# Altium PCB Kar_PCB.PcbDoc
Units mil, origin at the board's own origin, x right, y up, seen from the top; angles counter-clockwise.
Board outline 5655 x 3804.13 mil, 4 copper layers (Top Layer, Layer 1, Layer 2, Bottom Layer), stack 31.732 mil thick; 55 components, 40 nets, 277 pads, 218 vias.
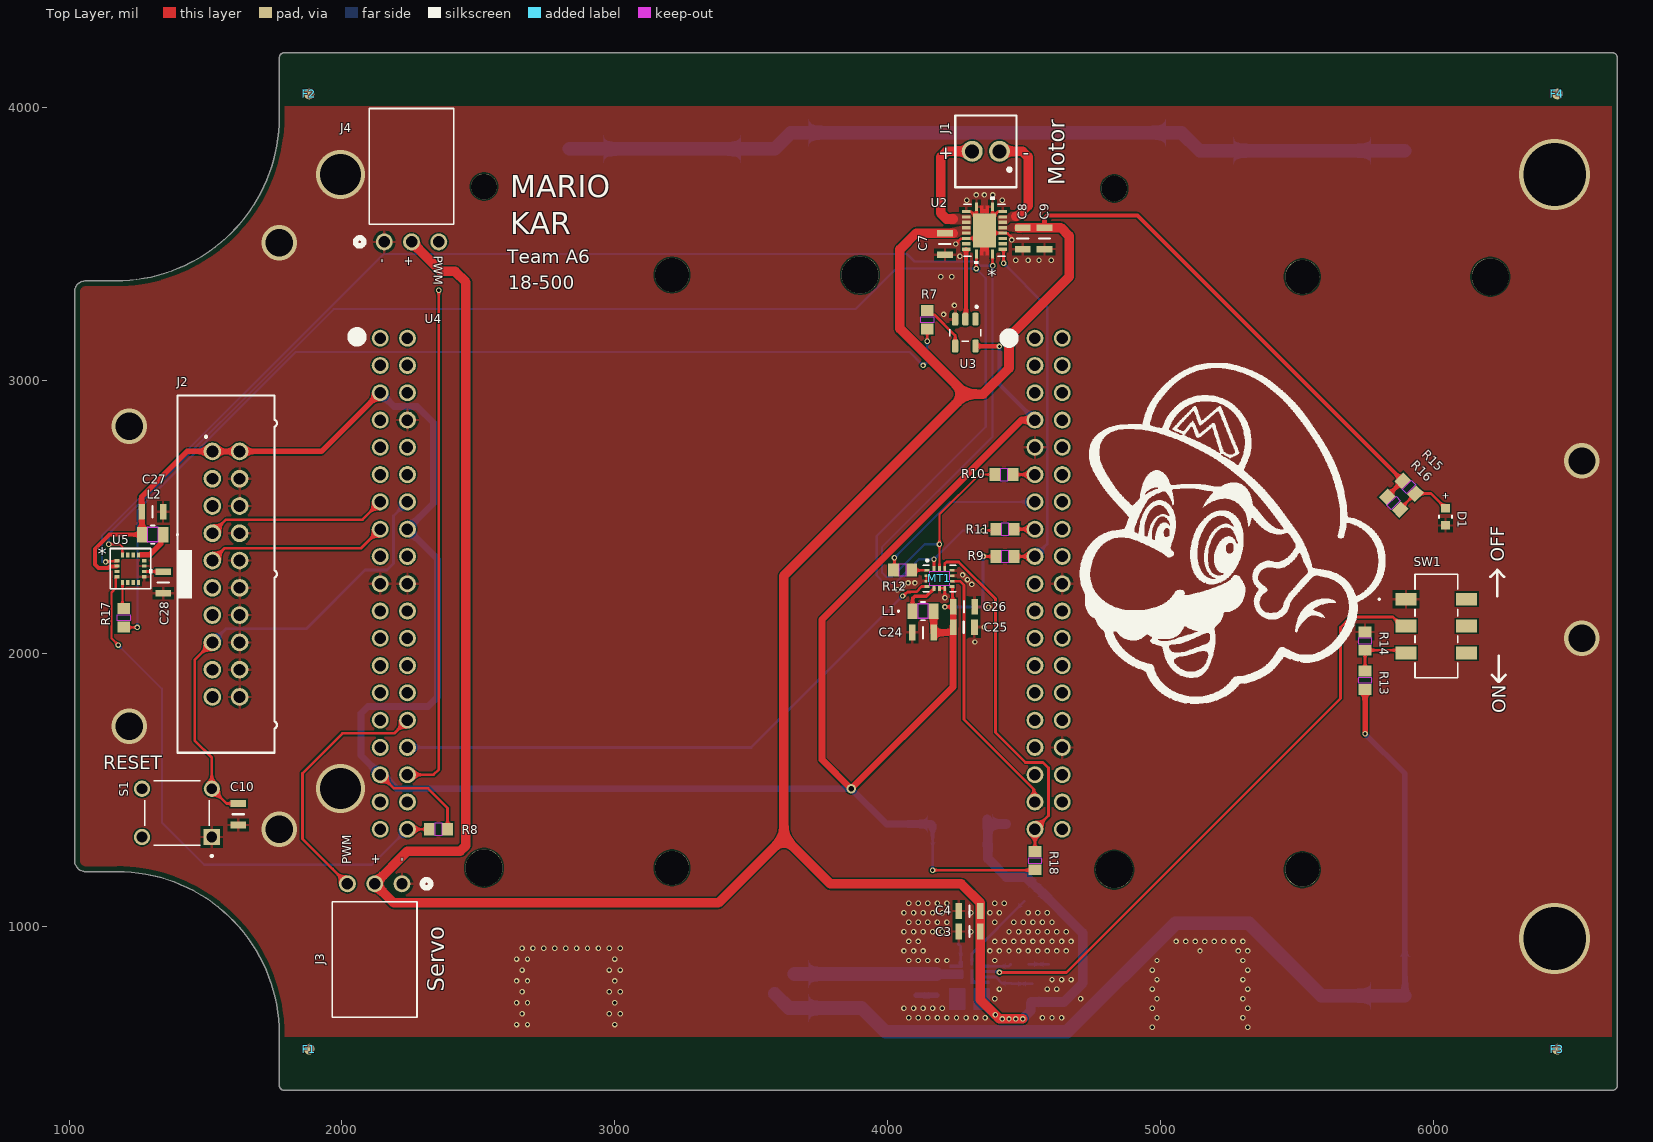
[diagram p0: Top Layer view]
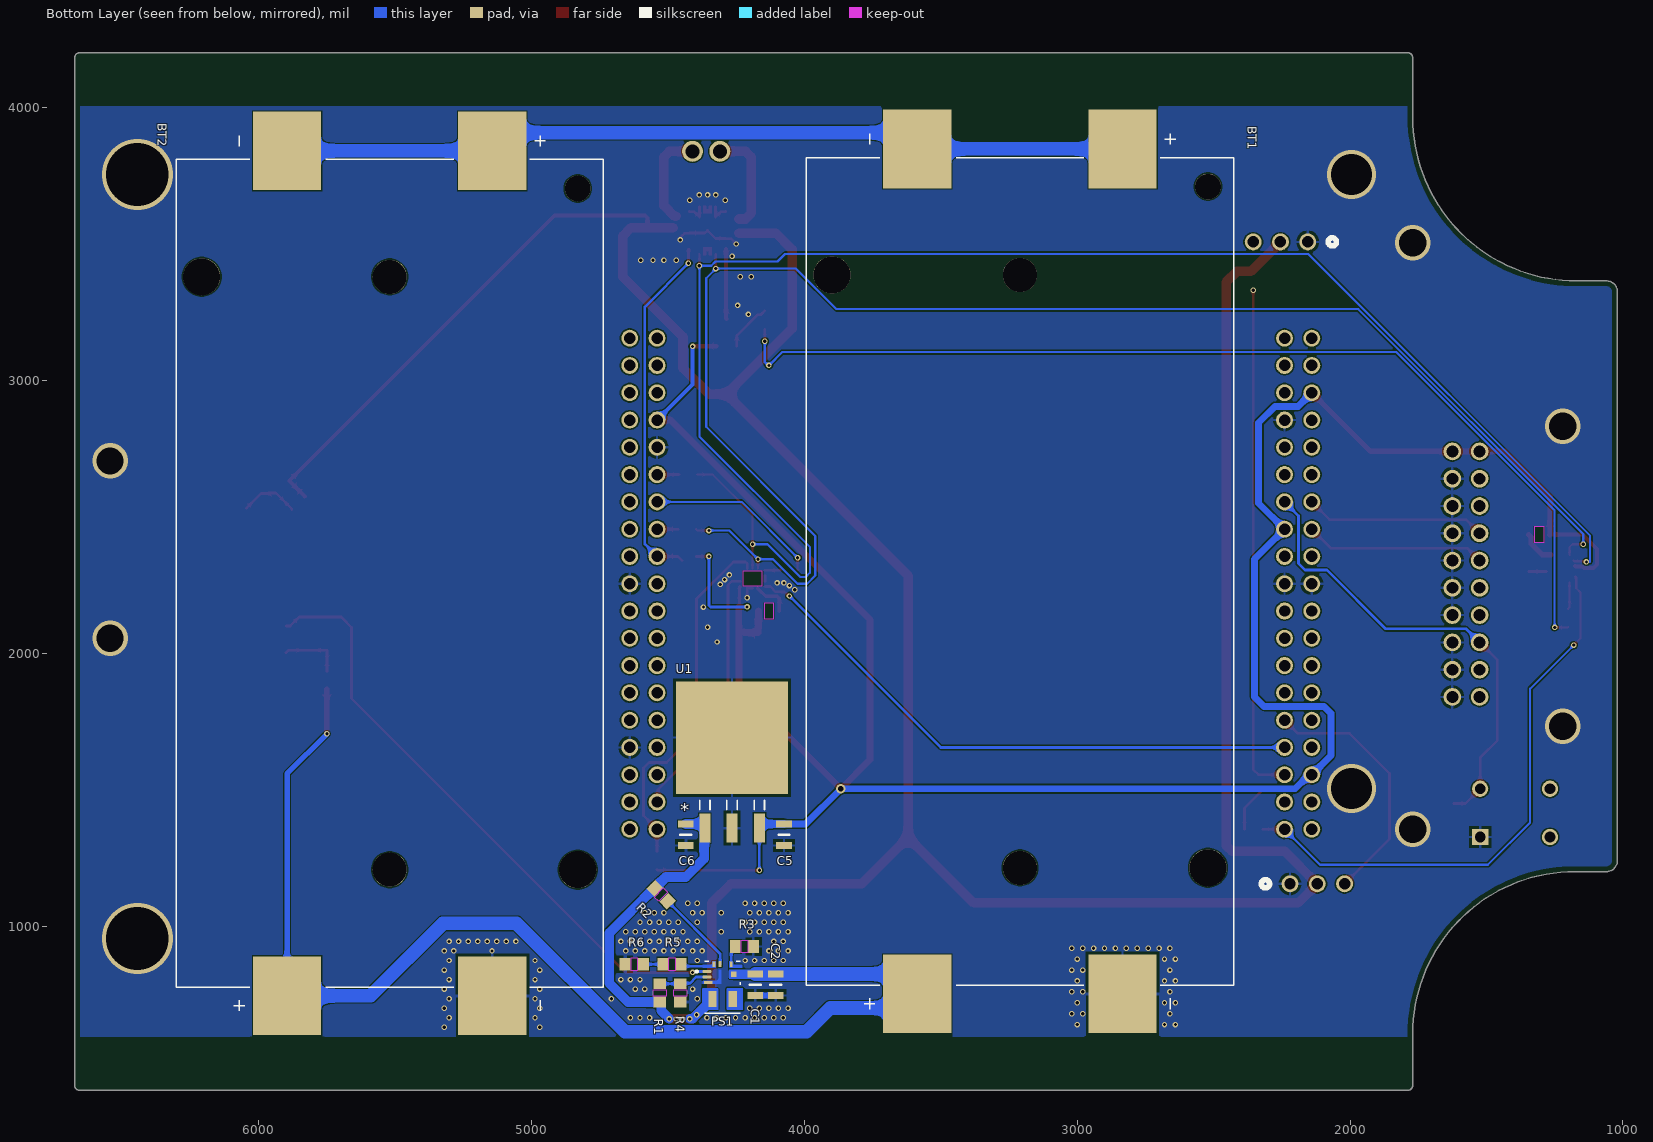
[diagram p1: Bottom Layer view, seen from below]
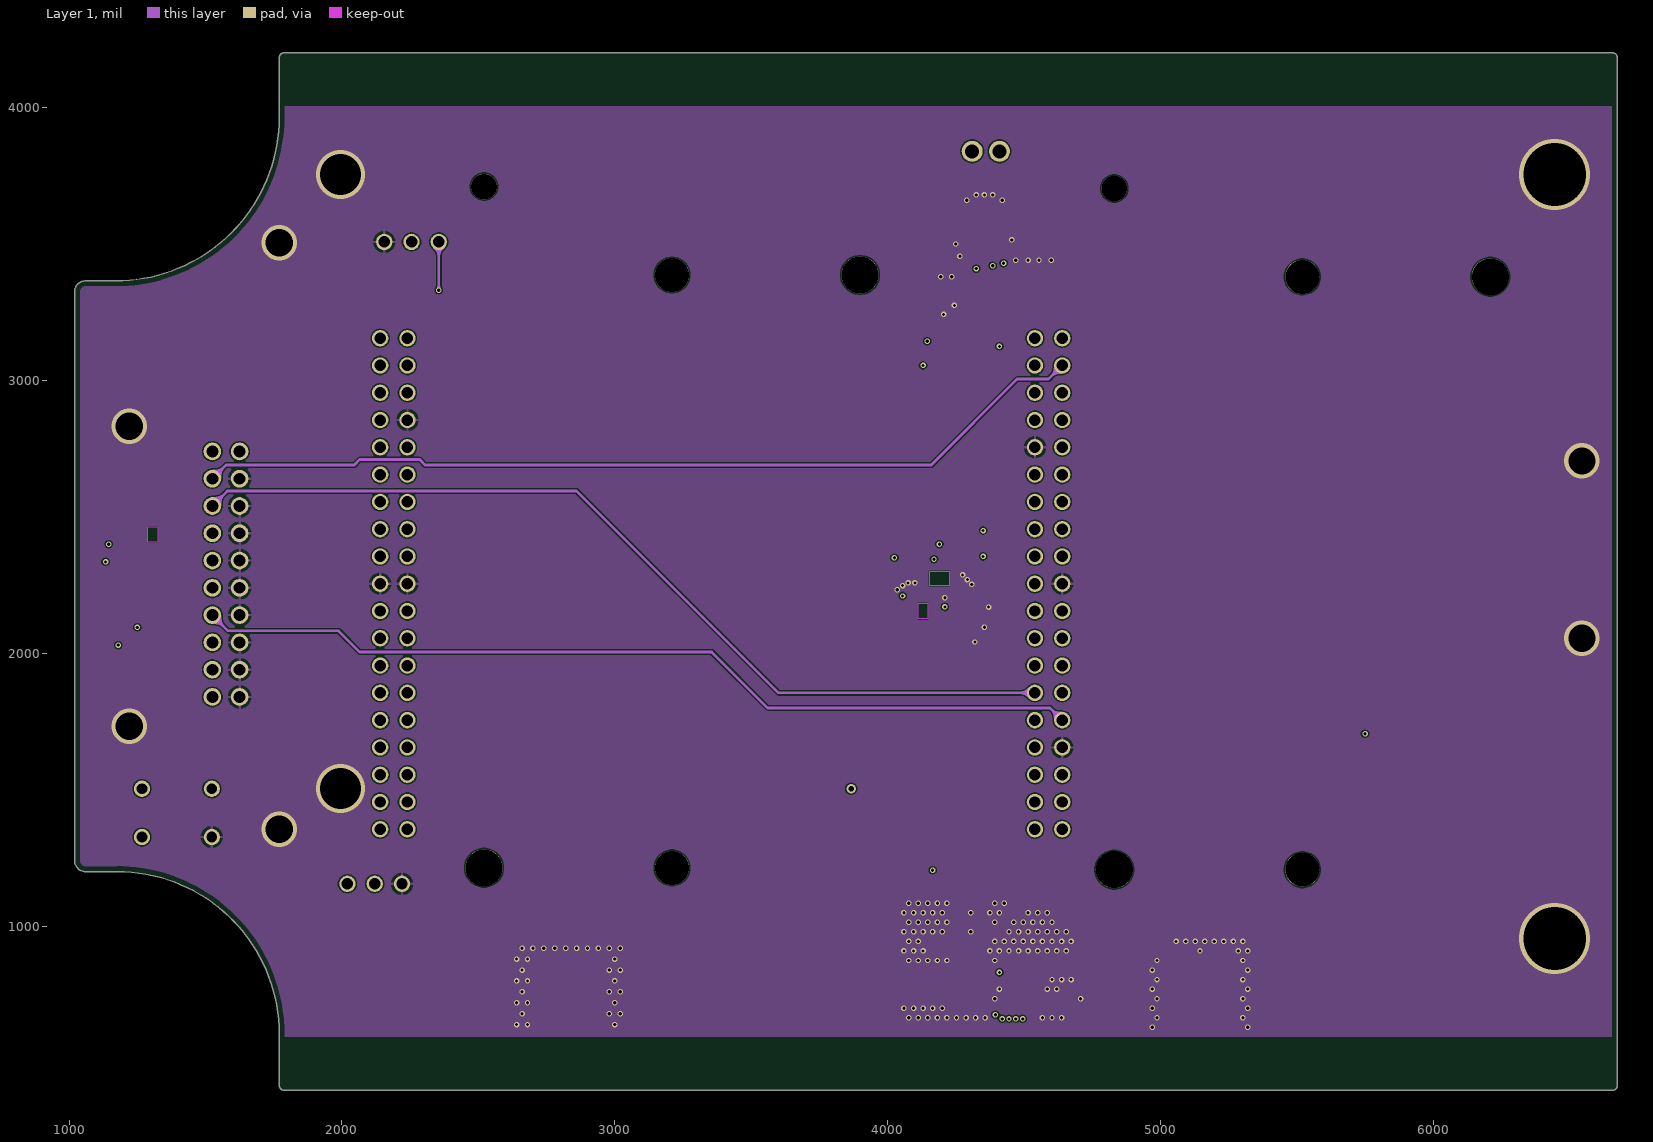
[diagram p2: Layer 1]
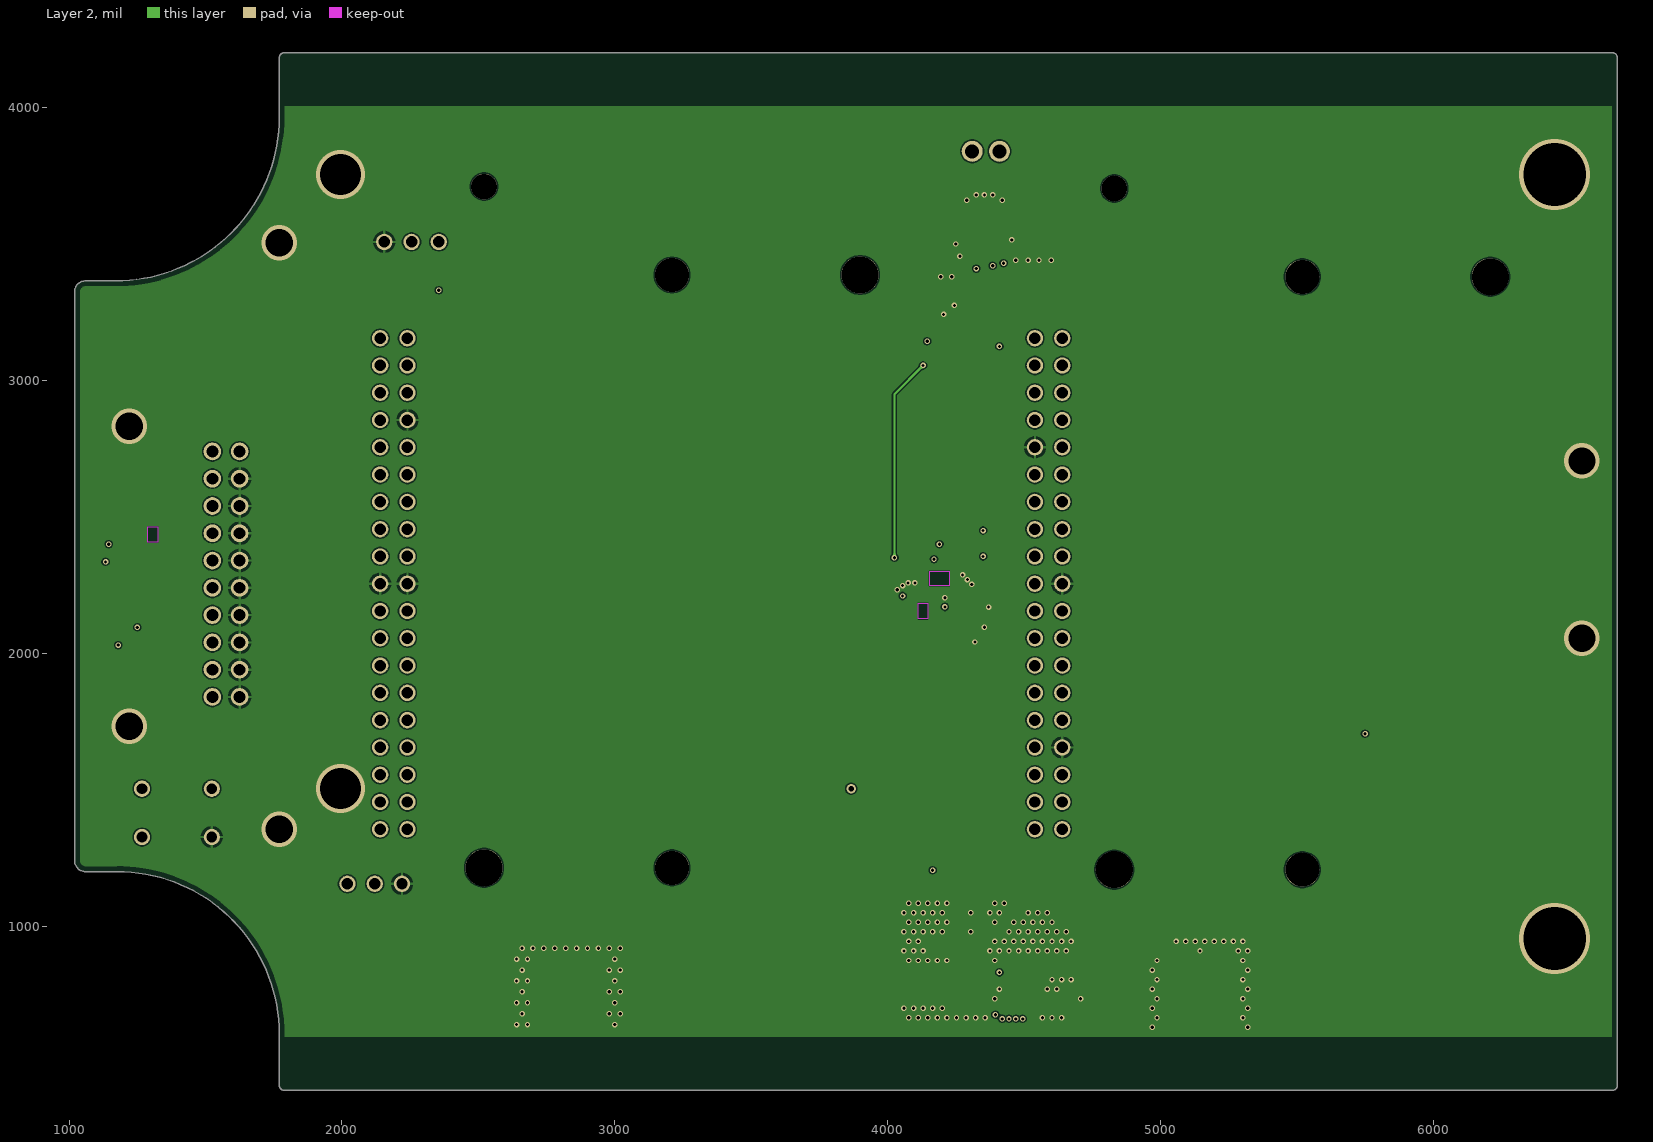
[diagram p3: Layer 2]
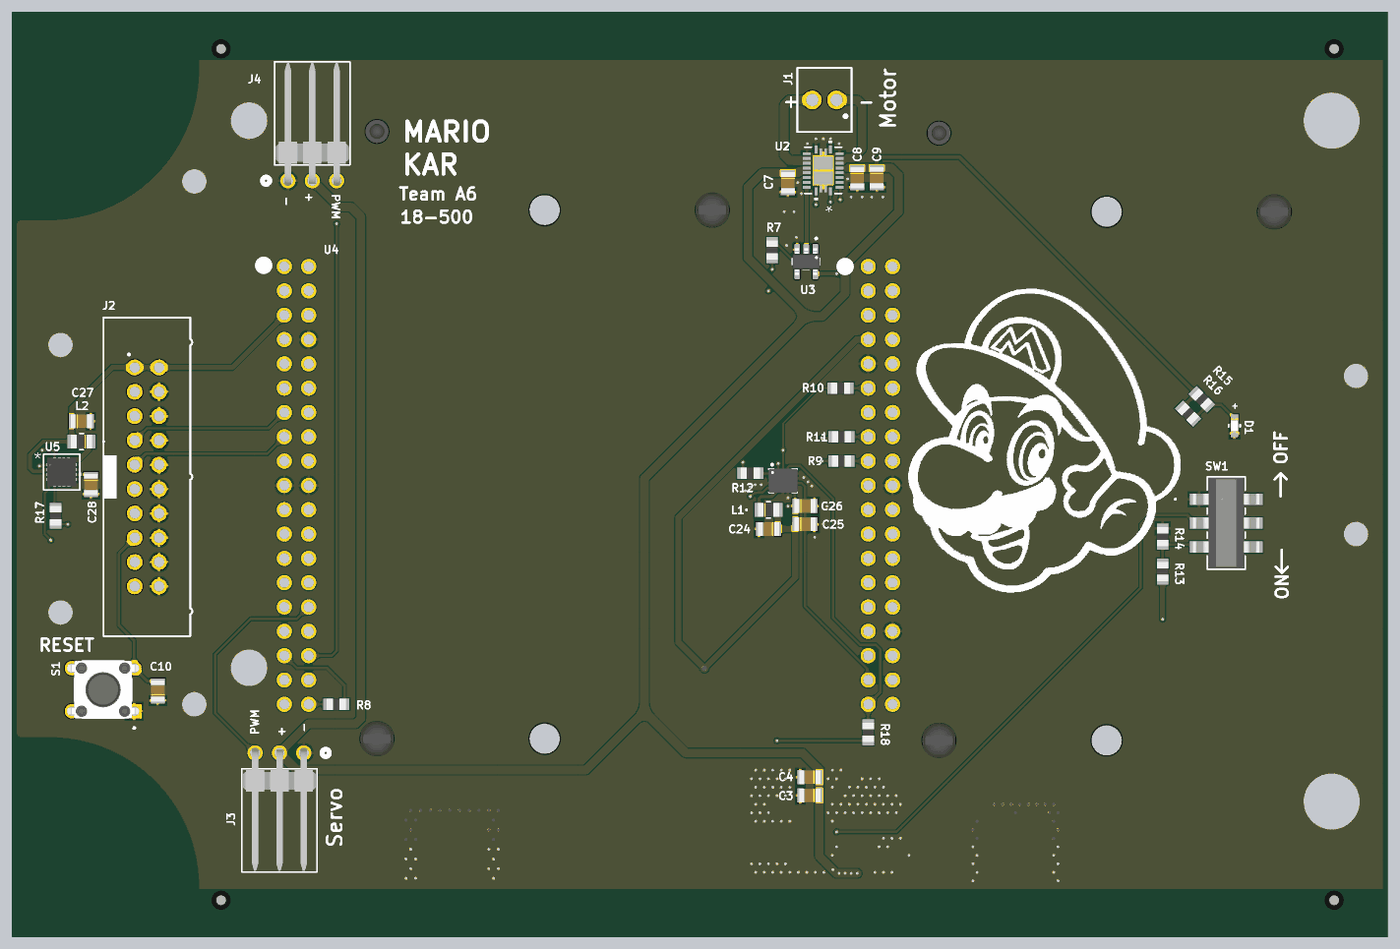
[diagram p4: 3D render of the assembled board from above, using the file's embedded part models]
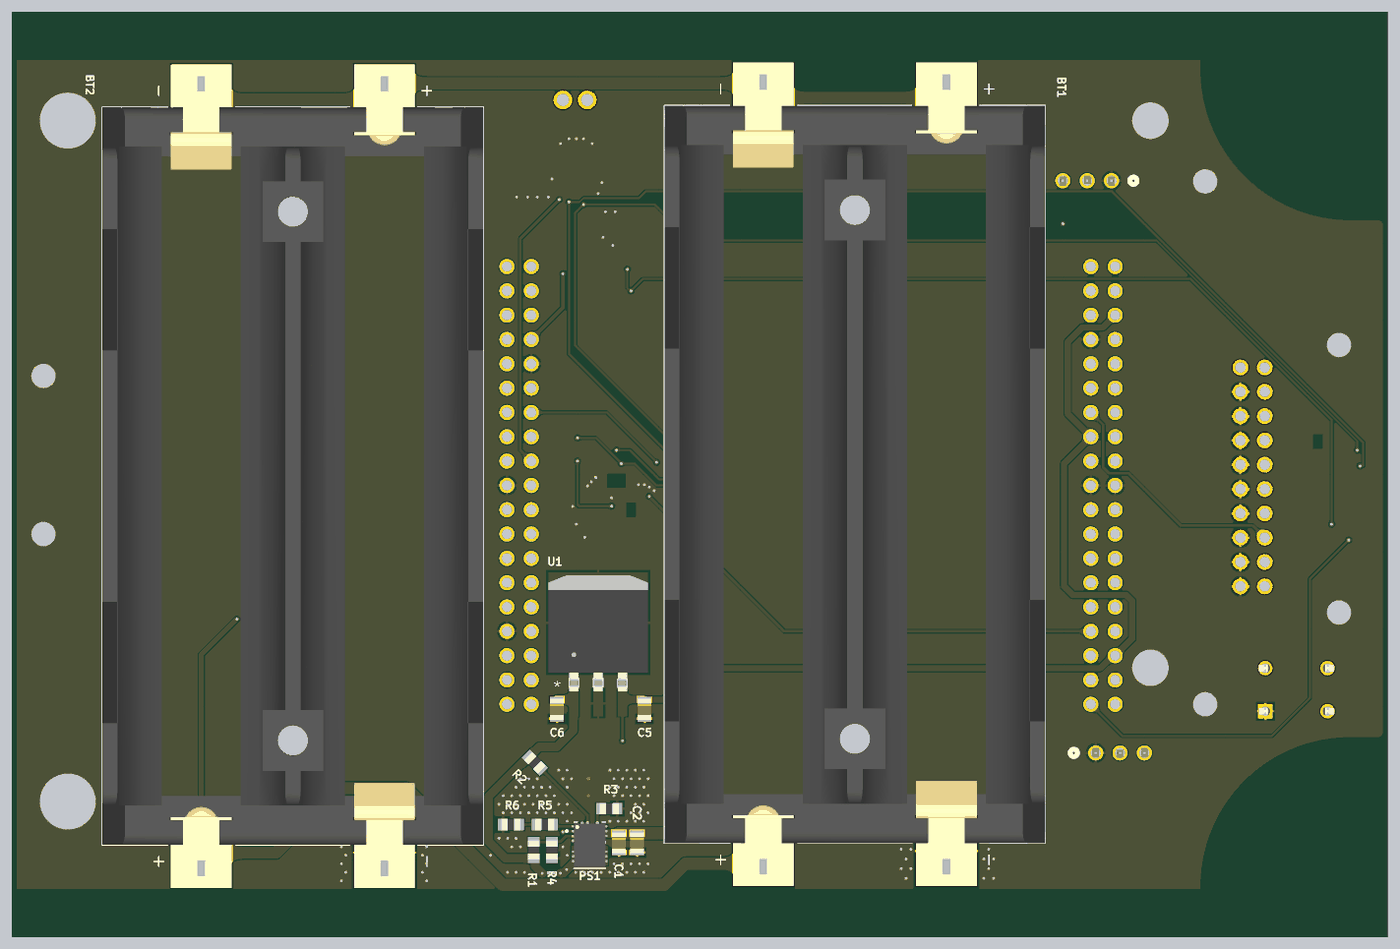
[diagram p5: 3D render of the assembled board from below, using the file's embedded part models]

## Layer stack, top to bottom
Top Solder: solder mask 0.3937, Solder Resist, Dk 3.5
Top Layer: signal copper 2.7559
Dielectric 2: prepreg 7.9921, PP-022, Dk 4.5
Layer 1: signal copper 1.1811
Dielectric 1: dielectric 7.874, FR-4, Dk 4.8
Layer 2: signal copper 1.1811
Dielectric 3: prepreg 7.9921, PP-022, Dk 4.5
Bottom Layer: signal copper 2.7559
Bottom Solder: solder mask 0.3937, Solder Resist, Dk 3.5

## Board outline
1060,1200.94 1175,1200.94 cw(c1175,605.94) 1770,605.94 1770,418.31 ccw(c1789.69,418.31) 1789.69,398.62 6655.31,398.62 ccw(c6655.31,418.31) 6675,418.31 6675,4183.07 ccw(c6655.32,4183.07) 6655.32,4202.76 1789.68,4202.76 ccw(c1789.68,4183.07) 1770,4183.07 1770,3965.94 cw(c1170,3965.94) 1170,3365.94 1060,3365.94 ccw(c1060,3325.94) 1020,3325.94 1020,1240.94 ccw(c1060,1240.94)

## Design rules (kind name [scope] priority, off if disabled: settings)
BoardOutlineClearance [All] p1: gap=19.68 ignorepadtopadclearanceinfootprint=FALSE
Clearance Clearance_KOL [IsKeepOut] p1: gap=2 ignorepadtopadclearanceinfootprint=FALSE
Clearance Clearance_KOL_1 [OnLayer('Keep-Out Layer')] p2: gap=2 ignorepadtopadclearanceinfootprint=FALSE
Clearance [All] p3: gap=5 ignorepadtopadclearanceinfootprint=FALSE
ComponentClearance ComponentClearance_1 [All vs InComponent('U4')] p1: gap=-1 collisioncheckmode=3 verticalgap=-1 showdistances=FALSE
ComponentClearance [All] p2: gap=10 collisioncheckmode=3 verticalgap=10 showdistances=FALSE
HoleSize [All] p1: absolutevalues=TRUE maxlimit=236.22 minlimit=0.98 maxpercent=80.000 minpercent=20.000
MinimumSolderMaskSliver [All] p1: minsoldermaskwidth=5
PolygonConnect PolygonConnect_5V [All vs InNet('5V')] p1: connectstyle=Direct reliefconductorwidth=10 reliefentries=4 polygonreliefangle="90 Angle" airgapwidth=10
PolygonConnect PolygonConnect_J1_1 [All vs InNet('NetJ1_1')] p2: connectstyle=Direct reliefconductorwidth=10 reliefentries=4 polygonreliefangle="90 Angle" airgapwidth=10
PolygonConnect PolygonConnect_J1_2 [All vs InNet('NetJ1_2')] p3: connectstyle=Direct reliefconductorwidth=10 reliefentries=4 polygonreliefangle="90 Angle" airgapwidth=10
PolygonConnect PolygonConnect_Stitch [isVia and InNet('GND')] p4: connectstyle=Direct reliefconductorwidth=10 reliefentries=4 polygonreliefangle="90 Angle" airgapwidth=10
PolygonConnect [All] p5: connectstyle=Relief reliefconductorwidth=10 reliefentries=4 polygonreliefangle="90 Angle" airgapwidth=10
RoutingVias [All] p1: holewidth=11.81 width=20 viastyle="Through Hole" minholewidth=11.81 minwidth=20 maxholewidth=230 maxwidth=260
SilkToSilkClearance [All] p1: silktosilkclearance=7
SolderMaskExpansion [All] p1: expansion=4 istentingtop=FALSE
SupplyNets "Schematic Supply Nets_1" [InNet('5V')] p1: voltage=0.000
Width Width_S50 [InNetClass('S50')] p1: maxlimit=13.01 minlimit=5.48 preferedwidth=13.01 toplayer_minwidth=13.01 midlayer1_maxwidth=5.48 midlayer1_prefwidth=5.48 midlayer2_maxwidth=5.48 midlayer2_prefwidth=5.48 bottomlayer_minwidth=13.01 impedanceprofiledriven=TRUE impedanceprofileid={861DD816-028D-45EC-A50D-6FCF3679BF68} impedanceprofilevalue=50.000000 minimp=50.000000 maximp=50.000000 favimp=50.000000
Width Width_S62 [InNetClass('S62')] p2: maxlimit=8.17 minlimit=2.99 preferedwidth=8.17 toplayer_minwidth=8.17 midlayer1_maxwidth=2.99 midlayer1_prefwidth=2.99 midlayer2_maxwidth=2.99 midlayer2_prefwidth=2.99 bottomlayer_minwidth=8.17 impedanceprofiledriven=TRUE impedanceprofileid={597D7582-E736-41B3-9602-78B84F21D497} impedanceprofilevalue=62.000000 minimp=50.000000 maximp=50.000000 favimp=50.000000
Width [All] p3: maxlimit=50 minlimit=8 preferedwidth=10
26 further rules are at their usual default settings.

## Classes and differential pairs
component class U_Magnetometer: C27 C28 L2 R17
component class U_STM32: C10 J2 J3 J4 R8 R9 R10 R11 R18 S1 U4
component class U_Power: C1 C2 C3 C4 C5 C6 D1 PS1 R1 R2 R3 R4 R5 R6 R13 R14 R15 R16 SW1 U1
component class U_Motor: C7 C8 C9 R7 U2 U3
component class U_Kar_IMU: C24 C25 C26 L1 MT1 R12
component class Kar_PCB: BT1 BT2 F1 F2 F3 F4 J1

## Components (designator, comment, footprint, x,y, rotation, side; value= is the part's Value field where it differs from the comment)
BT1 "1048P" BAT_1048P 3210,2301.26 r90 bottom locked
BT2 "1048P" BAT_1048P 5520,2294.33 r90 bottom locked
C1 "C2012X5R1H106K125AC" CAPC2012X145N 4180,786.26 r90 bottom value=10u
C2 "KAM21BR71H104JM" CAPC2012X145N 4105,786.26 r90 bottom value=0.1u
C3 "C2012X5R1V226M125AC" CAPC2012X145N 4300,981.26 r0 top value=22u
C4 "C2012X5R1V226M125AC" CAPC2012X145N 4300,1055.94 r0 top value=22u
C5 "T58W0476M8R2C0500" CAPC2012X145N 4074.68,1335.94 r90 bottom value=47u
C6 "GCM21BR71H474KA55K" CAPC2012X145N 4434.69,1335.94 r90 bottom value=0.47u
C7 "KAM21BR71H104JM" CAPC2012X145N 4210,3501.26 r90 top value=0.1u
C8 "KAM21BR71H104JM" CAPC2012X145N 4495,3521.26 r90 top value=0.1u
C9 "C2012X5R1H106K125AC" CAPC2012X145N 4575,3521.89 r90 top value=10u
C10 "KAM21BR71H104JM" CAPC2012X145N 1620,1410.94 r270 top value=0.1u
C24 "KAM21BR71H104JM" CAPC2012X145N 4130,2076.77 r0 top value=0.1u
C25 "KAM21BR71H104JM" CAPC2012X145N 4279.37,2096.26 r180 top value=0.1u
C26 "C2012X7R1H225K125AE" CAPC2012X145N 4280,2171.26 r180 top value=2.2u
C27 "KGM21AR51H105KU" CAPC2012X145N 1305,2519.68 r180 top value=1u
C28 "C2012X5R1H106K125AC" CAPC2012X145N 1345,2260.28 r90 top value=10u
D1 "WL-SMCW_0603" WL-SMCW_0603 6045,2501.26 r90 top
F1 "Fiducial" Fiducial_Footprint#1 1880,398.62 r0 top
F2 "Fiducial" Fiducial_Footprint#2 1880,398.62 r0 top
F3 "Fiducial" Fiducial_Footprint#1 6455,398.62 r0 top
F4 "Fiducial" Fiducial_Footprint#2 6455,398.62 r0 top
J1 "691210910002" 691210910002 4360,3840.94 r180 top
J2 "6120XX21621_61202021621" 61202021621 1575,2290.94 r270 top
J3 "22289033" CONN03_22289033_MOL 2220,1155.94 r0 top
J4 "22289033" CONN03_22289033_MOL 2155,3508.86 r180 top
L1 "MPZ2012S601AT000" IND_2012_TDK 4130,2155.51 r0 top
L2 "MPZ2012S601AT000" IND_2012_TDK 1306.5,2436.02 r180 top
MT1 "ICM-42670-P" XDCR_ICM-42670-P 4190,2275.33 r0 top
PS1 "TPSM843321RCJR" MODULE_TPSM843321RCJR 4300,776.26 r180 bottom
R1 "RC0805FR-0773K2L" RC0805N_YAG 4530,756.26 r90 bottom value=73.2k
R2 "RC0805FR-0710KL" RC0805N_YAG 4525,1115.94 r225 bottom value=10k
R3 "RC0805FR-0718KL" RC0805N_YAG 4220,926.26 r180 bottom value=18k
R4 "RC0805FR-0710KL" RC0805N_YAG 4455,756.26 r270 bottom value=10k
R5 "RC0805FR-0718KL" RC0805N_YAG 4485,861.26 r0 bottom value=18k
R6 "RC0805FR-0722KL" RC0805N_YAG 4623.5,861.26 r0 bottom value=22k
R7 "RC0805JR-07100RL" RC0805N_YAG 4145,3223.43 r90 top value=100
R8 "RC0805JR-074K7L" RC0805N_YAG 2353.5,1355.94 r180 top value=4.7k
R9 "RC0805JR-074K7L" RC0805N_YAG 4430,2355.94 r0 top value=4.7k
R10 "RC0805JR-07100RL" RC0805N_YAG 4426.5,2655.94 r180 top value=100
R11 "RC0805JR-07100RL" RC0805N_YAG 4430,2455.94 r180 top value=100
R12 "RC0805JR-07100RL" RC0805N_YAG 4055,2306.26 r0 top value=100
R13 "RC0805FR-0710KL" RC0805N_YAG 5750,1902.13 r90 top value=10k
R14 "RC0805FR-0710KL" RC0805N_YAG 5750,2045.63 r90 top value=10k
R15 "RC0805JR-07100RL" RC0805N_YAG 5911.31,2609.95 r315 top value=100
R16 "RC0805JR-07100RL" RC0805N_YAG 5855,2551.26 r315 top value=100
R17 "RC0805JR-07100RL" RC0805N_YAG 1200,2130.94 r90 top value=100
R18 "RC0805JR-074K7L" RC0805N_YAG 4540,1240.94 r270 top value=4.7k
S1 "TS02-66-70-BK-260-LCR-D" SW_TS02-66-70-BK-260-LCR-D 1395,1415.94 r180 top
SW1 "SLW-913535-2A-SMT" SLW-913535_CUD 6011.22,2100.94 r0 top
U1 "LM3940ISX-3.3/NOPB" TS3B 4265,1685.94 r180 bottom
U2 "DRV8242SQRHLRQ1" VQFN20_RHL_TEX 4355,3551.26 r180 top
U3 "SN74LV1T34DBVR" SOT95P280X145-5N 4285,3176.26 r270 top
U4 "STM32_WB55" PCBComponent_1 3390,1355.94 r0 top locked
U5 "MMC5983MA" MMC5983MA_MEM 1225,2310.94 r0 top

## Footprints (in the part's own frame and the unit in brackets; to place one, negate y for a bottom-side part, rotate by r counter-clockwise, add the part's x,y. Pads: shape width x height; smd on the part's side, far side on the other; paste and mask are expansions set on the pad)
61202021621 [mm]
  round 1.65 hole 1.1: 1(-11.43,-1.27) 2(-11.43,1.27) 3(-8.89,-1.27) 4(-8.89,1.27) 5(-6.35,-1.27) 6(-6.35,1.27) 7(-3.81,-1.27) 8(-3.81,1.27) 9(-1.27,-1.27) 10(-1.27,1.27) 11(1.27,-1.27) 12(1.27,1.27) 13(3.81,-1.27) 14(3.81,1.27) 15(6.35,-1.27) 16(6.35,1.27) 17(8.89,-1.27) 18(8.89,1.27) 19(11.43,-1.27) 20(11.43,1.27)
  silkscreen extent -16.63,-4.52 16.63,4.74
691210910002 [mm]
  round 1.95 hole 1.3: 1(-1.27,0) 2(1.27,0)
  silkscreen extent -2.84,-3.35 2.84,3.35
BAT_1048P [mm]
  rect 7.34x6.35 smd: N1(39.33,9.555) N2(-39.33,-9.555) P1(-39.33,9.555) P2(39.33,-9.555)
  round 3.45 hole 3.45 unplated: ""(-27.6,-17.505) ""(27.6,17.505)
  round 3.17 hole 3.17 unplated: ""(-27.6,0) ""(27.6,0)
  round 2.39 hole 2.39 unplated: ""(35.82,-17.505)
  silkscreen extent -40.75,-19.89 40.75,19.89, body extent -43,-19.89 43,19.89, height 15.05
CAPC2012X145N [mm]
  rect 0.62x1.47 smd: 1(-1,0) 2(1,0)
  silkscreen extent 0,-0.53 0,0.53, body extent -1.1,-0.72 1.1,0.72, height 1.5
CONN03_22289033_MOL [mil]
  round 62 / inner round 60 / far side round 62 hole 42 paste-99999 mask+0: 1(0,0) 2(-100,0) 3(-200,0)
  silkscreen extent -255,-489 105,15, body extent -250,-484 50,20, height 98
Fiducial_Footprint#1 [mm]
  round 1 smd mask+0.5: 1(0,3.85)
Fiducial_Footprint#2 [mm]
  round 1 smd mask+0.5: 1(0,92.775)
IND_2012_TDK [mm]
  rect 0.956x1.45 smd paste+0 mask+0: 1(-0.978,0) 2(0.978,0)
  Top Layer keep-out region: -0.449,-0.674 -0.449,0.674 0.449,0.674 0.449,-0.674
  Keep-Out Layer region: -0.449,-0.725 -0.449,0.725 0.449,0.725 0.449,-0.725
  silkscreen extent -2.37,-0.85 0.19,0.85, body extent -1.1,-0.72 1.1,0.72, height 1.1
MMC5983MA_MEM [mil]
  rect 18x12 smd paste+0 mask+0: 1(-50.2,29.53) 2(-50.2,9.84) 3(-50.2,-9.84) 4(-50.2,-29.53) 9(50.2,-29.53) 10(50.2,-9.84) 11(50.2,9.84) 12(50.2,29.53)
  rect 12x18 smd paste+0 mask+0: 5(-29.53,-50.2) 6(-9.84,-50.2) 7(9.84,-50.2) 8(29.53,-50.2) 13(29.53,50.2) 14(9.84,50.2) 15(-9.84,50.2) 16(-29.53,50.2)
  silkscreen extent -74,-74 79,74, body extent -61,-61 61,61, height 39
MODULE_TPSM843321RCJR [mm]
  rrect40% 0.8x0.25 smd mask+0: 1(-1.45,1.475) 2(-1.45,0.975)
  rect 0.8x0.25 smd mask+0: 3(-1.35,0.463)
  rect 0.75x1.5 smd paste-2 mask+0: 4(-0.95,-1.088) 5(0.95,-1.088)
  rect 0.5x0.5 smd paste-1 mask+0: 6(1.05,1.225)
  rect 0.25x0.5 smd paste-1 mask+0: 7(0.8,2.15) 9(-0.8,2.15)
  rrect33% 0.3x0.55 smd mask+0: 8(-0.225,2.175)
  Top Layer region: 199 vertices and 0 holes, not listed, extent -1.85,0.326 -0.125,1.65
  Top Layer region: 176 vertices and 0 holes, not listed, extent -1.85,1.85 -0.625,2.45
  Top Layer region: -0.49,-0.076 -0.484,-0.076 -0.479,-0.077 -0.474,-0.078 -0.469,-0.08 -0.464,-0.082 -0.459,-0.084 -0.455,-0.086 -0.45,-0.088 -0.446,-0.091 -0.441,-0.094 -0.437,-0.097 -0.433,-0.101 -0.429,-0.104 -0.426,-0.108 -0.422,-0.112 -0.419,-0.116 -0.416,-0.121 -0.413,-0.125 -0.411,-0.13 -0.409,-0.134 -0.407,-0.139 -0.405,-0.144 -0.403,-0.149 -0.402,-0.154 -0.401,-0.159 -0.401,-0.165 -0.4,-0.17 -0.4,-0.175 -0.4,-2 -0.4,-2.005 -0.401,-2.01 -0.401,-2.016 -0.402,-2.021 -0.403,-2.026 -0.405,-2.031 -0.407,-2.036 -0.409,-2.041 -0.411,-2.045 -0.413,-2.05 -0.416,-2.054 -0.419,-2.059 -0.422,-2.063 -0.426,-2.067 -0.429,-2.071 -0.433,-2.074 -0.437,-2.078 -0.441,-2.081 -0.446,-2.084 -0.45,-2.087 -0.455,-2.089 -0.459,-2.091 -0.464,-2.093 -0.469,-2.095 -0.474,-2.097 -0.479,-2.098 -0.484,-2.099 -0.49,-2.099 -0.495,-2.1 -1.805,-2.1 -1.81,-2.099 -1.816,-2.099 -1.821,-2.098 -1.826,-2.097 -1.831,-2.095 -1.836,-2.093 -1.841,-2.091 -1.845,-2.089 -1.85,-2.087 -1.854,-2.084 -1.859,-2.081 -1.863,-2.078 -1.867,-2.074 -1.871,-2.071 -1.874,-2.067 -1.878,-2.063 -1.881,-2.059 -1.884,-2.054 -1.887,-2.05 -1.889,-2.045 -1.891,-2.041 -1.893,-2.036 -1.895,-2.031 -1.897,-2.026 -1.898,-2.021 -1.899,-2.016 -1.899,-2.01 -1.9,-2.005 -1.9,-2 -1.9,-0.175 -1.9,-0.17 -1.899,-0.165 -1.899,-0.159 -1.898,-0.154 -1.897,-0.149 -1.895,-0.144 -1.893,-0.139 -1.891,-0.134 -1.889,-0.13 -1.887,-0.125 -1.884,-0.121 -1.881,-0.116 -1.878,-0.112 -1.874,-0.108 -1.871,-0.104 -1.867,-0.101 -1.863,-0.097 -1.859,-0.094 -1.854,-0.091 -1.85,-0.088 -1.845,-0.086 -1.841,-0.084 -1.836,-0.082 -1.831,-0.08 -1.826,-0.078 -1.821,-0.077 -1.816,-0.076 -1.81,-0.076 -1.805,-0.075 -0.495,-0.075
  Top Layer region: 176 vertices and 0 holes, not listed, extent 0.625,1.85 1.85,2.45
  Top Layer region: 1.81,1.649 1.816,1.649 1.821,1.648 1.826,1.647 1.831,1.645 1.836,1.643 1.841,1.641 1.845,1.639 1.85,1.637 1.854,1.634 1.859,1.631 1.863,1.628 1.867,1.624 1.871,1.621 1.874,1.617 1.878,1.613 1.881,1.609 1.884,1.604 1.887,1.6 1.889,1.595 1.891,1.591 1.893,1.586 1.895,1.581 1.897,1.576 1.898,1.571 1.899,1.566 1.899,1.56 1.9,1.555 1.9,1.55 1.9,0.9 1.9,0.895 1.899,0.89 1.899,0.884 1.898,0.879 1.897,0.874 1.895,0.869 1.893,0.864 1.891,0.859 1.889,0.855 1.887,0.85 1.884,0.846 1.881,0.841 1.878,0.837 1.874,0.833 1.871,0.829 1.867,0.826 1.863,0.822 1.859,0.819 1.854,0.816 1.85,0.813 1.845,0.811 1.841,0.809 1.836,0.807 1.831,0.805 1.826,0.803 1.821,0.802 1.816,0.801 1.81,0.801 1.805,0.8 0.695,0.8 0.69,0.801 0.684,0.801 0.679,0.802 0.674,0.803 0.669,0.805 0.664,0.807 0.659,0.809 0.655,0.811 0.65,0.813 0.646,0.816 0.641,0.819 0.637,0.822 0.633,0.826 0.629,0.829 0.626,0.833 0.622,0.837 0.619,0.841 0.616,0.846 0.613,0.85 0.611,0.855 0.609,0.859 0.607,0.864 0.605,0.869 0.603,0.874 0.602,0.879 0.601,0.884 0.601,0.89 0.6,0.895 0.6,0.9 0.6,1.55 0.6,1.555 0.601,1.56 0.601,1.566 0.602,1.571 0.603,1.576 0.605,1.581 0.607,1.586 0.609,1.591 0.611,1.595 0.613,1.6 0.616,1.604 0.619,1.609 0.622,1.613 0.626,1.617 0.629,1.621 0.633,1.624 0.637,1.628 0.641,1.631 0.646,1.634 0.65,1.637 0.655,1.639 0.659,1.641 0.664,1.643 0.669,1.645 0.674,1.647 0.679,1.648 0.684,1.649 0.69,1.649 0.695,1.65 1.805,1.65
  Top Layer region: 1.81,-0.076 1.816,-0.076 1.821,-0.077 1.826,-0.078 1.831,-0.08 1.836,-0.082 1.841,-0.084 1.845,-0.086 1.85,-0.088 1.854,-0.091 1.859,-0.094 1.863,-0.097 1.867,-0.101 1.871,-0.104 1.874,-0.108 1.878,-0.112 1.881,-0.116 1.884,-0.121 1.887,-0.125 1.889,-0.13 1.891,-0.134 1.893,-0.139 1.895,-0.144 1.897,-0.149 1.898,-0.154 1.899,-0.159 1.899,-0.165 1.9,-0.17 1.9,-0.175 1.9,-2 1.9,-2.005 1.899,-2.01 1.899,-2.016 1.898,-2.021 1.897,-2.026 1.895,-2.031 1.893,-2.036 1.891,-2.041 1.889,-2.045 1.887,-2.05 1.884,-2.054 1.881,-2.059 1.878,-2.063 1.874,-2.067 1.871,-2.071 1.867,-2.074 1.863,-2.078 1.859,-2.081 1.854,-2.084 1.85,-2.087 1.845,-2.089 1.841,-2.091 1.836,-2.093 1.831,-2.095 1.826,-2.097 1.821,-2.098 1.816,-2.099 1.81,-2.099 1.805,-2.1 0.495,-2.1 0.49,-2.099 0.484,-2.099 0.479,-2.098 0.474,-2.097 0.469,-2.095 0.464,-2.093 0.459,-2.091 0.455,-2.089 0.45,-2.087 0.446,-2.084 0.441,-2.081 0.437,-2.078 0.433,-2.074 0.429,-2.071 0.426,-2.067 0.422,-2.063 0.419,-2.059 0.416,-2.054 0.413,-2.05 0.411,-2.045 0.409,-2.041 0.407,-2.036 0.405,-2.031 0.403,-2.026 0.402,-2.021 0.401,-2.016 0.401,-2.01 0.4,-2.005 0.4,-2 0.4,-0.175 0.4,-0.17 0.401,-0.165 0.401,-0.159 0.402,-0.154 0.403,-0.149 0.405,-0.144 0.407,-0.139 0.409,-0.134 0.411,-0.13 0.413,-0.125 0.416,-0.121 0.419,-0.116 0.422,-0.112 0.426,-0.108 0.429,-0.104 0.433,-0.101 0.437,-0.097 0.441,-0.094 0.446,-0.091 0.45,-0.088 0.455,-0.086 0.459,-0.084 0.464,-0.082 0.469,-0.08 0.474,-0.078 0.479,-0.077 0.484,-0.076 0.49,-0.076 0.495,-0.075 1.805,-0.075
  silkscreen extent -2.5,-2.42 1.65,2.42, body extent -1.65,-2.25 1.65,2.25, height 2.05
PCBComponent_1 [mil]
  round 62 / inner round 60 / far side round 62 hole 42 paste-99999 mask+0: 1_L(-1250,1800) 1_R(1150,1800) 2_L(-1150,1800) 2_R(1250,1800) 3_L(-1250,1700) 3_R(1150,1700) 4_L(-1150,1700) 4_R(1250,1700) 5_L(-1250,1600) 5_R(1150,1600) 6_L(-1150,1600) 6_R(1250,1600) 7_L(-1250,1500) 7_R(1150,1500) 8_L(-1150,1500) 8_R(1250,1500) 9_L(-1250,1400) 9_R(1150,1400) 10_L(-1150,1400) 10_R(1250,1400) 11_L(-1250,1300) 11_R(1150,1300) 12_L(-1150,1300) 12_R(1250,1300) 13_L(-1250,1200) 13_R(1150,1200) 14_L(-1150,1200) 14_R(1250,1200) 15_L(-1250,1100) 15_R(1150,1100) 16_L(-1150,1100) 16_R(1250,1100) 17_L(-1250,1000) 17_R(1150,1000) 18_L(-1150,1000) 18_R(1250,1000) 19_L(-1250,900) 19_R(1150,900) 20_L(-1150,900) 20_R(1250,900) 21_L(-1250,800) 21_R(1150,800) 22_L(-1150,800) 22_R(1250,800) 23_L(-1250,700) 23_R(1150,700) 24_L(-1150,700) 24_R(1250,700) 25_L(-1250,600) 25_R(1150,600) 26_L(-1150,600) 26_R(1250,600) 27_L(-1250,500) 27_R(1150,500) 28_L(-1150,500) 28_R(1250,500) 29_L(-1250,400) 29_R(1150,400) 30_L(-1150,400) 30_R(1250,400) 31_L(-1250,300) 31_R(1150,300) 32_L(-1150,300) 32_R(1250,300) 33_L(-1250,200) 33_R(1150,200) 34_L(-1150,200) 34_R(1250,200) 35_L(-1250,100) 35_R(1150,100) 36_L(-1150,100) 36_R(1250,100) 37_L(-1250,0) 37_R(1150,0) 38_L(-1150,0) 38_R(1250,0)
  silkscreen extent -1351,1784 1071,1821
RC0805N_YAG [mil]
  rect 40x47 smd paste+0 mask+0: 1(-33.5,0) 2(33.5,0)
  Top Layer keep-out region: -11.5,-23.5 -11.5,23.5 11.5,23.5 11.5,-23.5
  body extent -39,-24 39,24, height 28
SLW-913535_CUD [mil]
  rect 77x47 smd paste+0 mask+0: 1(-111.22,98.43) 2(-111.22,0) 3(-111.22,-98.43) 4(111.22,98.43) 5(111.22,0) 6(111.22,-98.43)
  silkscreen extent -212,-190 78,190, body extent -136,-185 136,185, height 217
SOT95P280X145-5N [mm]
  rrect50% 1.21x0.59 smd: 1(-1.255,0.95) 2(-1.255,0) 3(-1.255,-0.95) 4(1.255,-0.95) 5(1.255,0.95)
  silkscreen extent -2.51,-1.45 0.8,1.45, body extent -1.4,-1.45 1.4,1.45, height 1.45
SW_TS02-66-70-BK-260-LCR-D [mm]
  rect 1.508x1.508 / inner round 1.508 / far side rect 1.508x1.508 hole 1: 1(-3.25,2.25)
  round 1.508 hole 1: 2(3.25,2.25) 3(-3.25,-2.25) 4(3.25,-2.25)
  silkscreen extent -3.35,-3 3,4.1, body extent -3.95,-3 3.95,3, height 7
TS3B [mil]
  rect 40x106 smd paste-53 mask-53: 1(-100,-326) 2(0,-326) 3(100,-326)
  rect 410x412 smd paste-206 mask-206: 4(0,6)
  silkscreen extent -119,-259 119,-224, body extent -205,-278 205,200, height 189
VQFN20_RHL_TEX [mil]
  rect 12x32 smd paste+0 mask+0: 1(-29.53,86.5) 10(-29.53,-86.5) 11(29.53,-86.5) 20(29.53,86.5)
  rect 32x12 smd paste+0 mask+0: 2(-67,68.9) 3(-67,49.21) 4(-67,29.53) 5(-67,9.84) 6(-67,-9.84) 7(-67,-29.53) 8(-67,-49.21) 9(-67,-68.9) 12(67,-68.9) 13(67,-49.21) 14(67,-29.53) 15(67,-9.84) 16(67,9.84) 17(67,29.53) 18(67,49.21) 19(67,68.9)
  rect 85x124 smd paste-61.5 mask+0: 21(0,0)
  Top Layer region: -15,62 15,62 15,90.5 5,90.5 5,77.5 -5,77.5 -5,90.5 -15,90.5
  Top Layer region: -15,-62 15,-62 15,-90.5 5,-90.5 5,-77.5 -5,-77.5 -5,-90.5 -15,-90.5
  silkscreen extent -76,-122 76,122
WL-SMCW_0603 [mm]
  rect 0.8x0.8 smd: 1(-0.8,0) 2(0.8,0)
  silkscreen extent -0.1,-0.61 0.1,0.61, body extent -0.8,-0.4 0.8,0.4, height 0.7
XDCR_ICM-42670-P [mm]
  rect 0.475x0.25 smd paste-1 mask+0.051: 1(-1.162,0.75) 2(-1.162,0.25) 3(-1.162,-0.25) 4(-1.162,-0.75) 8(1.162,-0.75) 9(1.162,-0.25) 10(1.162,0.25) 11(1.162,0.75)
  rect 0.25x0.475 smd paste-1 mask+0.051: 5(-0.5,-0.913) 6(0,-0.913) 7(0.5,-0.913) 12(0.5,0.913) 13(0,0.913) 14(-0.5,0.913)
  Keep-Out Layer region: 0.925,-0.675 -0.925,-0.675 -0.925,0.675 0.925,0.675
  silkscreen extent -1.5,-1.25 1.5,1.77, body extent -1.5,-1.25 1.5,1.25, height 0.81

## Part data
BT1 BT2: "SMT Polarized Holder for Dual 18650 Batteries", Package=None, Availability="In Stock", Check_prices=https://www.snapeda.com/parts/1048P/Keystone+Electronics/view-part/?ref=eda, MF="Keystone Electronics", MP=1048P, Price=None, Purchase-URL=https://pricing.snapeda.com/search/part/1048P/?ref=eda, SnapEDA_Link=https://www.snapeda.com/parts/1048P/Keystone+Electronics/view-part/?ref=snap
C1 C9 C28: "Multilayer Ceramic Chip Capacitors, Capacitance=10?F, LxWxT:2x1.25x1.25mm", Manufacturer_Name=TDK, Mouser Part Number=810-C2012X5R1H106K12, Rated Voltage=50V, Datasheet Link=https://product.tdk.com/info/en/catalog/datasheets/mlcc_commercial_midvoltage_en.pdf, Geometry.Height=1.45mm, Manufacturer_Part_Number=C2012X5R1H106K125AC, Mouser Price/Stock=https://www.mouser.co.uk/ProductDetail/TDK/C2012X5R1H106K125AC?qs=rSMjJ%252B1ewcQGpfDVduhUmg%3D%3D
C2 C7 C8 C10 C24 C25: "Multilayer Ceramic Chip Capacitors, Capacitance=0.1u", Rated Voltage=50V, Manufacturer_Part_Number=KAM21BR71H104JM
C3 C4: "Multilayer Ceramic Chip Capacitors, Capacitance=22u", Rated Voltage=35V, Manufacturer_Part_Number=C2012X5R1V226M125AC
C5: "47 µF Molded Tantalum Polymer Capacitor 8.2 V 0805 (2012 Metric) 500mOhm @ 100kHz", Rated Voltage=8.2V, Manufacturer_Part_Number=T58W0476M8R2C0500
C6: "Multilayer Ceramic Chip Capacitors, Capacitance=0.47u", Rated Voltage=50V, Manufacturer_Part_Number=GCM21BR71H474KA55K
C26: "Multilayer Ceramic Chip Capacitors, Capacitance=2.2u", Rated Voltage=50V, Manufacturer_Part_Number=C2012X7R1H225K125AE
C27: "Multilayer Ceramic Chip Capacitors, Capacitance=1u", Rated Voltage=50V, Manufacturer_Part_Number=KGM21AR51H105KU
D1: "0603, Green Typ.(@20mA): 520nm, 430mcd, 3.2V, 140Â° InGaN", Package="0603 WÃ¼rth Elektronik", Check_prices=https://www.snapeda.com/parts/150060GS75000/Wurth+Electronics/view-part/?ref=eda, MF="Wurth Electronics", MP=150060GS75000, SnapEDA_Link=https://www.snapeda.com/parts/150060GS75000/Wurth+Electronics/view-part/?ref=snap
J1 J2 MT1: Package=None, Availability=Unavailable, Price=None
  J1: MF="{'manufacturer': u'W\xfcrth Elektronik'}", MP=691210910002
  J2: MF="{'manufacturer': u'W\xfcrth Elektronik'}", MP=61202021621
  MT1: MP=ICM-42670-P
J3 J4: "KK 254 Breakaway Header, Right-Angle Surface Mount Compatible, 3 Circuits, 0.38Âµm Gold (Au) Selective Plating, Mating Pin Length 8.23mm, with Kinked PC Tails", Manufacturer_Name="Molex Connector Corporation", Copyright="Copyright (C) 2025 Ultra Librarian. All rights reserved.", Datasheet=https://www.molex.com/en-us/products/part-detail-pdf/22289033?display=pdf, Manufacturer_Part_Number=22289033, RefDes=RefDes, Type=Type
L1 L2: "No Description Available", Manufacturer_Name=TDK, Copyright="Copyright (C) 2025 Ultra Librarian. All rights reserved.", Manufacturer_Part_Number=MPZ2012S601AT000
PS1: "Non-Isolated PoL Module DC DC Converter 1 Output 5V 3A 3.8V - 18V Input", Package=None, Check_prices=https://www.snapeda.com/parts/TPSM843321RCJR/Texas+Instruments/view-part/?ref=eda, MF="Texas Instruments", MP=TPSM843321RCJR, SnapEDA_Link=https://www.snapeda.com/parts/TPSM843321RCJR/Texas+Instruments/view-part/?ref=snap
R1: "RES 0805 73.2k 1% 1/8W", Manufacturer_Name=Yageo, Tolerance=1%, Manufacturer_Part_Number=RC0805FR-0773K2L
R2 R4 R13 R14: "RES 0805 10k 1% 1/8W", Manufacturer_Name=Yageo, Tolerance=1%, Manufacturer_Part_Number=RC0805FR-0710KL
R3 R5: "RES 0805 18k 1% 1/8W", Manufacturer_Name=Yageo, Tolerance=1%, Manufacturer_Part_Number=RC0805FR-0718KL
R6: "RES 0805 22k 1% 1/8W", Manufacturer_Name=Yageo, Tolerance=1%, Manufacturer_Part_Number=RC0805FR-0722KL
R7 R10 R11 R12 R15 R16 R17: "RES 0805 100 5% 1/8W", Manufacturer_Name=Yageo, Tolerance=5%, Manufacturer_Part_Number=RC0805JR-07100RL
R8 R9 R18: "RES 0805 4.7k 5% 1/8W", Manufacturer_Name=Yageo, Tolerance=5%, Manufacturer_Part_Number=RC0805JR-074K7L
S1: "6 x 6 mm, 7 mm Actuator Height, 260 gf, Black, Long Crimped, Through Hole, SPST, Tactile Switch", Package=None, Check_prices=https://www.snapeda.com/parts/TS02-66-70-BK-260-LCR-D/Same+Sky/view-part/?ref=eda, MF="Same Sky", MP=TS02-66-70-BK-260-LCR-D, SnapEDA_Link=https://www.snapeda.com/parts/TS02-66-70-BK-260-LCR-D/Same+Sky/view-part/?ref=snap
SW1: "No Description Available", Manufacturer_Name="Same Sky", Copyright="Copyright (C) 2025 Ultra Librarian. All rights reserved.", Manufacturer_Part_Number=SLW-913535-2A-SMT, RefDes=RefDes, Type="Slide Switches"
U1: library part LM3940ISX-3.3NOPB, "1-A, low-dropout voltage regulator for 5-V to 3.3-V conversion 3-DDPAK/TO-263 -40 to 125", Manufacturer_Name="Texas Instruments", Copyright="Copyright (C) 2025 Ultra Librarian. All rights reserved.", Datasheet=https://www.ti.com/lit/gpn/lm3940, Manufacturer_Part_Number=LM3940ISX-3.3/NOPB, RefDes=RefDes, Type=LM3940IS-3.3
U2: "Automotive, 40-V 6-A H-bridge driver with integrated current sensing and feedback 20-VQFN -40 to 125", Manufacturer_Name="Texas Instruments", Copyright="Copyright (C) 2025 Ultra Librarian. All rights reserved.", Datasheet=https://www.ti.com/lit/gpn/drv8242-q1, Manufacturer_Part_Number=DRV8242SQRHLRQ1, RefDes=RefDes, Type="Power Management"
U3: "Single Power Supply BUFFER Logic Level Shifter (no enable)", Package="SOT-23-5 Texas Instruments", Check_prices=https://www.snapeda.com/parts/SN74LV1T34DBVR/Texas+Instruments/view-part/?ref=eda, MF="Texas Instruments", MP=SN74LV1T34DBVR, SnapEDA_Link=https://www.snapeda.com/parts/SN74LV1T34DBVR/Texas+Instruments/view-part/?ref=snap
U5: "No Description Available", Manufacturer_Name=Memsic, Copyright="Copyright (C) 2025 Ultra Librarian. All rights reserved.", Manufacturer_Part_Number=MMC5983MA, RefDes=RefDes, Type=Type

## Via types
v1: diameter 20, hole 11.81, Top Layer to Bottom Layer, tented both sides, 207 vias
v2: diameter 130, hole 100, Top Layer to Bottom Layer, 6 vias
v3: diameter 180, hole 150, Top Layer to Bottom Layer, 2 vias
v4: diameter 260, hole 230, Top Layer to Bottom Layer, 2 vias
v5: diameter 35, hole 20, Top Layer to Bottom Layer, tented both sides, 1 vias

## Nets (pads, with @x,y where several pads share a name; then routed paths per layer and width w, separated by ;. In a path a pad name is that pad's centre, name@x,y a point inside that pad or via, vN(x,y) a via of type N, cw(c..) or ccw(c..) an arc to the next point about the centre after c; other vN are vias at no path point)
3V3: C5.2 C24.2 C25.2 C26.2 C27.2 J2.1 J2.2 L1.2 L2.2 MT1.8 R8.1 R9.1 R18.2 U1.3 U3.5 U4.5_L U4.7_R U4.16_L U4.33_L U5.2 | length 10048.4
  Top Layer w10: U4.33_L 2190,1505.94 2315,1505.94 2387,1433.94 R8.1 ; v1(4165,1205.94) 4538.5,1205.94 R18.2 ; v1(4210,2170.94) 4210.31,2171.26 C26.2 4238.2,2173.69 4238.2,2245.73 4238.12,2245.81 MT1.8 ; v1(4350,2355.94) R9.1
  Top Layer w15: U5.2 1173.62,2319.6 1148.91,2319.6 1142.75,2313.44 1108.26,2313.44 1095,2326.7 1095,2382.76 1148.26,2436.02 L2.2 ; U3.5@4323.31,3125.94 U3.5 4322.85,3126.4 4409.55,3126.4 v1(4410,3125.94)
  Top Layer w20: L2.2 1266.82,2437.21 1266.82,2518.5 C27.2 1265.63,2574.45 1432.13,2740.94 J2.1 J2.2 1925,2740.94 U4.5_L
  Top Layer w25: L1.2 4168.5,2093.79 4169.37,2092.91 C24.2 4220.51,2076.77 4223.56,2079.82 4239.7,2079.82 4240,2080.12 C25.2 ; C25.2@4239.7,2100.94 4240,2100.65 C25.2 ; C25.2@4240.63,2096.89 C26.2 ; U4.7_R 4491.11,2855.94 3760,2124.84 3760,1610.94 v5(3866.5,1504.44) 4240,1877.94 C25.2
  Bottom Layer w10: v1(4165,1205.94) U1.3 ; v1(4210,2170.94) 4344.14,2170.94 4350,2176.8 v1(4350,2355.94)
  Bottom Layer w15: v1(4410,3125.94) 4410,2985.94 U4.7_R
  Bottom Layer w25: U4.5_L 2190,2905.94 2275,2905.94 2335,2845.94 2335,2550.94 U4.16_L 2350,2345.94 2350,1840.94 2315,1805.94 2095,1805.94 2070,1780.94 2070,1625.94 U4.33_L 2150,1555.94 2201.5,1504.44 v5(3866.5,1504.44) 3995.93,1375.02 4074.39,1375.02 C5.2
  Bottom Layer w30: C5.2 4160,1375.31 4165,1370.31 U1.3
5V: C3.2 C4.2 C6.2 C7.2 C8.2 C9.2 J3.2 J4.2 PS1.4 R1.1 R2.1 R15.1 R16.1 U1.1 U2.6 U2.15 U2.16 | length 12530.6
  Top Layer w12: C8.2@4494.53,3561.1 4494.69,3560.94 C8.2
  Top Layer w15: C9.2 4575,3597.16 4583.79,3605.94 4915.31,3605.94 R15.1 5887.62,2632.45 5831.31,2576.14 R16.1
  Top Layer w35: J4.2 2363.27,3400.59 2415,3400.59 2454.04,3361.55 2454.04,1296.23 2433.54,1275.72 2239.78,1275.72 J3.2 2190,1085.94 3380,1085.94 3620,1325.94 ; 4240,3541.42 4239.61,3541.02 4105.08,3541.02 4045,3480.94 4045,3190.94 4285,2950.94 ; C8.2@4480,3560.94 4494.69,3560.94 C8.2@4495.31,3560.94 ; v1(4495,660.94) v1(4470,660.94) v1(4445,660.94) v1(4420,660.94) 4410,660.94 v1(4395,675.94) 4339.37,731.57 C3.2 C4.2 4340,1056.57 4340,1085.94 4270,1155.94 3790,1155.94 3620,1325.94 ; C8.2 C8.2@4495.31,3560.94 ; 3620,1325.94 3620,2285.94 4285,2950.94 ; 4285,2950.94 4350,2950.94 4445,3045.94 4445,3160.94 4665,3380.94 4665,3530.94 4635,3560.94 C8.2@4495.31,3560.94
  Bottom Layer w35: PS1.4 4409.59,661.26 v1@4420,661.26 ; U1.1@4365,1392.94 U1.1@4365,1372.81 ; C6.2 4367.5,1375.31 U1.1@4365,1372.81 ; v1(4495,660.94) 4524,689.94 4524,720.26 4526.5,722.76 R1.1 4646.5,722.76 4715,791.26 4715,976.26 R2.1@4550.16,1141.1 ; R2.1 4507.38,1180.94 4435,1180.94 4367.5,1248.44 4367.5,1357.44 U1.1 U1.1@4365,1372.81
C\S\_IMU: MT1.12 R18.1 U4.37_R | length 1328.1
  Top Layer w10: MT1.12 4209.69,2329.77 4215.54,2335.63 4260.31,2335.63 4395.14,2200.81 4395.14,1710.81 4505,1600.94 4570,1600.94 4590,1580.94 4590,1405.94 U4.37_R R18.1
C\S\_Mag: R8.2 U4.38_L U5.4 | length 2084.6
  Top Layer w8: U5.4 1172.63,2281.42 1170.63,2279.42 1170.63,2239.55 1155,2223.92 1155,2055.94 v1(1180,2030.94) ; U4.38_L R8.2
  Bottom Layer w8: v1(1180,2030.94) 1340,1870.94 1340,1380.94 1495,1225.94 2110,1225.94 U4.38_L
C\S\_Motor: R9.2 U2.2 U4.17_R | length 1311.5
  Top Layer w10: U2.2 4424,3482.36 4425,3481.36 v1(4425,3430.94) ; R9.2@4448.5,2340.94 R9.2 U4.17_R
  Bottom Layer w10: v1(4425,3430.94) 4585,3270.94 4585,2400.94 U4.17_R
GND: BT1.N2 BT2.N2 C1.1 C2.1 C3.1 C4.1 C5.1 C6.1 C7.1 C8.1 C9.1 C10.2 C24.1 C25.1 C26.1 C27.1 C28.1 D1.1 J2.4 J2.6 J2.8 J2.10 J2.12 J2.14 J2.16 J2.18 J2.20 J3.1 J4.1 MT1.2 MT1.3 MT1.6 MT1.7 MT1.10 MT1.11 PS1.3 R3.2 R4.2 R6.2 R14.2 S1.1 SW1.1 U1.2 U1.4 U2.5 U2.9 U2.10 U2.11 U2.12 U2.17 U2.21 U3.3 U4.8_L U4.9_R U4.19_L U4.20_L U4.20_R U4.32_R U5.9 U5.11 | length 560.8
  Top Layer w10: MT1.3 MT1.2 ; MT1.6 MT1.7 4209.76,2239.33 4209.76,2204.96 v1(4210,2204.72) ; v1(4250,3501.26) 4269.47,3520.73 4287,3520.73 U2.17 4325.47,3521.73 U2.21 4364.84,3541.42 U2.5 4423,3540.42 4439.46,3540.42 4453.09,3526.79 4453.09,3518.17 v1(4455,3516.26) ; U2.12 4289,3619.16 4306.6,3619.16 4325.47,3600.29 U2.11 ; U2.10 4384.53,3600.29 4403.4,3619.16 4421,3619.16 U2.9
  Bottom Layer w20: C2.1 C1.1
  other v1: 4970,630 5320,630 2640,640 2680,640 3000,640 4077.5,665 4112.5,665 4147.5,665 4182.5,665 4217.5,665 4252.5,665 4287.5,665 4322.5,665 4357.5,665 4567.5,665 4602.5,665 4637.5,665 4987.5,665 5302.5,665 2660,680 2980,680 3020,680 4060,700 4095,700 4130,700 4165,700 4200,700 4970,700 5320,700 2640,720 2680,720 3000,720 4392.5,735 4707.5,735 4987.5,735 5302.5,735 2660,760 2980,760 3020,760 4410,770 4585,770 4620,770 4970,770 5320,770 2640,800 2680,800 3000,800 4602.5,805 4637.5,805 4672.5,805 4987.5,805 5302.5,805 2660,840 2980,840 3020,840 4970,840 5320,840 4077.5,875 4112.5,875 4147.5,875 4182.5,875 4217.5,875 4392.5,875 4987.5,875 5302.5,875 2640,880 2680,880 3000,880 4060,910 4095,910 4130,910 4375,910 4410,910 4445,910 4480,910 4515,910 4550,910 4585,910 4620,910 4655,910 5145,910 5285,910 5320,910 2660,920 2700,920 2740,920 2780,920 2820,920 2860,920 2900,920 2940,920 2980,920 3020,920 4077.5,945 4112.5,945 4392.5,945 4427.5,945 4462.5,945 4497.5,945 4532.5,945 4567.5,945 4602.5,945 4637.5,945 4672.5,945 5057.5,945 5092.5,945 5127.5,945 5162.5,945 5197.5,945 5232.5,945 5267.5,945 5302.5,945 4060,980 4095,980 4130,980 4165,980 4200,980 4305,980 4445,980 4480,980 4515,980 4550,980 4585,980 4620,980 4655,980 4077.5,1015 4112.5,1015 4147.5,1015 4182.5,1015 4217.5,1015 4392.5,1015 4462.5,1015 4497.5,1015 4532.5,1015 4567.5,1015 4602.5,1015 4060,1050 4095,1050 4130,1050 4165,1050 4200,1050 4305,1050 4375,1050 4410,1050 4515,1050 4550,1050 4585,1050 4077.5,1085 4112.5,1085 4147.5,1085 4182.5,1085 4217.5,1085 4392.5,1085 4427.5,1085 4320,2042.32 4355,2096.46 4370,2170.28 4035,2234.25 4055,2249.02 4308.35,2253.39 4075,2258.86 4100,2258.86 4292.63,2270.95 4275,2288.39 4205,3243.11 4245,3276.26 4195,3381.26 4235,3381.26 4470,3441.26 4515,3441.26 4555,3441.26 4600,3441.26 4265,3456.26 4290,3661.26 4420,3661.26 4325,3681.26 4355,3681.26 4385,3681.26
  other v2: 1770,1355.94 1220,1733.44 6545,2055.94 6545,2705.94 1220,2833.44 1770,3505.94
  other v3: 1995,1505.94 1995,3755.94
  other v4: 6445,955.94 6445,3755.94
MISO: R7.1 R12.1 R17.1 U4.13_R | length 5156.6
  Top Layer w8: R17.1 1201.5,2095.94 v1(1250,2095.94) ; R12.1 4025,2309.76 v1(4025,2350.94) ; v1(4145,3144.68) R7.1
  Layer 2 w8: v1(4025,2350.94) 4025,2950.94 v1(4130,3055.94)
  Bottom Layer w8: v1(1250,2095.94) 1250,2524.61 1830.5,3105.11 4080.83,3105.11 v1(4130,3055.94) 4133.06,3055.94 4145,3067.89 v1(4145,3144.68) ; v1(4025,2350.94) 4230,2555.94 U4.13_R
MOSI: MT1.14 R11.2 U2.20 U5.16 | length 5629.7
  Top Layer w8: v1(1145,2400.94) 1185,2400.94 1195,2390.94 1195,2361.61 U5.16 ; MT1.14@4170,2311.57 4170.16,2311.73 4170.16,2345.79 v1(4170,2345.94) ; v1(4325,3410.94) 4325.24,3411.18 4325.24,3464.52 U2.20 ; v1(4350,2450.94) 4391.5,2450.94 R11.2
  Bottom Layer w8: v1(1145,2400.94) 1145,2437.99 1969.46,3262.45 3882.53,3262.45 4031.02,3410.94 v1(4325,3410.94) 4360,3375.94 4360,2830.94 3960,2430.94 3960,2285.94 3990,2255.94 4025,2255.94 4115,2345.94 v1(4170,2345.94) 4275,2450.94 v1(4350,2450.94)
MOTOR_PWM: J4.3 U4.34_L | length 2056.8
  Top Layer w10: U4.34_L 2336.06,1555.94 2355,1574.88 v1(2355,3331.69)
  Layer 1 w10: v1(2355,3331.69) J4.3
NetBT1_N1: BT1.N1 BT1.P2 BT2.N1 BT2.P2 | length 3114.6
  Bottom Layer w50: BT1.P2 BT1.N1 3645.83,3909.33 5077.24,3909.33 BT2.P2 BT2.N1
NetC28_2: C28.2 U5.10 | length 65.1
  Top Layer w10: U5.10@1280.2,2301.1 1280.59,2300.71 1344.61,2300.71 C28.2@1345,2300.31
NetD1_2: D1.2 R15.2 R16.2 | length 216.2
  Top Layer w10: R16.2 5878.69,2529.95 R15.2 5937.47,2588.73 5958.69,2588.73 5961.16,2586.26 5991.5,2586.26 D1.2
NetJ1_1: J1.1 U2.7 U2.8 | length 353.5
  Top Layer w35: J1.1 4494.5,3840.94 4515,3820.44 4515,3641.73 4475.63,3602.36 4470,3602.36
NetJ1_2: J1.2 U2.13 U2.14 | length 383.7
  Top Layer w36: 4240,3592.52 4216.09,3592.52 4195,3613.61 4195,3819.86 4216.09,3840.94 J1.2
NetL1_1: L1.1 MT1.5 | length 141.6
  Top Layer w13: L1.1 4091.5,2202.03 4099.12,2209.65 4141.82,2209.65 4170.31,2238.14 MT1.5
NetL2_1: L2.1 U5.13 | length 125.4
  Top Layer w20: 1265,2361.47 1295.15,2361.47 1336.19,2402.51 1336.19,2427.21 L2.1
NetMT1_1: MT1.1 R12.2 | length 56.3
  Top Layer w10: R12.2 4089.9,2304.86 MT1.1
NetMT1_4: MT1.4 U4.32_L | length 2148.6
  Top Layer w10: v1(4055,2210.94) 4057.71,2210.94 4072.71,2225.94 4082.96,2225.94 4083.17,2226.15 4105.2,2226.15 4124.86,2245.81 MT1.4
  Bottom Layer w10: U4.32_L 3500,1655.94 v1(4055,2210.94)
NetMT1_9: MT1.9 U4.35_R | length 953
  Top Layer w10: MT1.9 4265.45,2265.49 4280,2250.94 4280,1757.96 4536.02,1501.94 4536.02,1459.93 U4.35_R
NetPS1_2: PS1.2 R1.2 R4.1 | length 183.2
  Bottom Layer w10: PS1.2 4396.61,814.65 4420,791.26 4453.5,791.26 R4.1 R1.2
NetPS1_7: PS1.7 R3.1 | length 79.5
  Bottom Layer w10: R3.1@4258.5,936.26 4268.5,926.26 PS1.7
NetPS1_8: PS1.8 R2.2 | length 310.1
  Bottom Layer w10: PS1.8 4308.86,899.8 R2.2
NetPS1_9: PS1.9 R5.1 | length 81.7
  Bottom Layer w10: 4372.83,854.02 4444.26,854.02 R5.1
NetR5_2: R5.2 R6.1 | length 71.5
  Bottom Layer w10: R5.2 R6.1
NetR7_2: R7.2 U3.4 | length 179.3
  Top Layer w10: R7.2 4160,3241.93 4171.4,3241.93 4247.6,3165.73 U3.4
NetR10_1: R10.1 U4.11_R | length 80
  Top Layer w10: R10.1 U4.11_R
NetR11_1: R11.1 U4.15_R | length 76.5
  Top Layer w10: R11.1 U4.15_R
NetR13_2: R13.2 R14.1 SW1.3 | length 230.5
  Top Layer w10: R13.2 R14.1 5890.39,2012.13 SW1.3
NetR17_2: R17.2 U5.5 | length 98.8
  Top Layer w8: U5.5 1195.47,2168.97 R17.2 R17.2@1200.47,2164.92
NetU2_19: U2.19 U3.2 | length 257.9
  Top Layer w15: U3.2 4287.5,3228.17 4287.5,3481.86 U2.19
RESET: C10.1 J2.15 S1.3 U4.14_L | length 1739.8
  Top Layer w10: J2.15 1460,1975.94 1460,1680.94 1522.95,1617.99 S1.3 1577.17,1450.31 C10.1
  Bottom Layer w10: J2.15 1575,2090.94 1870,2090.94 2085,2305.94 2165,2305.94 2189.02,2329.96 2189.02,2504.96 U4.14_L
SCK: MT1.13 R10.2 U2.1 U5.1 | length 5933.2
  Top Layer w8: v1(1133.43,2335.94) 1135.73,2338.24 1153.57,2338.24 1153.8,2338.47 1177.8,2338.47 U5.1@1179.8,2340.47 ; MT1.13 v1(4190,2400.94) 4190,2510.54 4335.41,2655.94 R10.2 ; U2.1 4384.76,3464.52 4384.76,3421.5 v1(4385,3421.26)
  Bottom Layer w8: v1(1133.43,2335.94) 1133.13,2336.25 1120,2336.25 1120,2431.38 2153.41,3464.79 4071.16,3464.79 4098.69,3437.26 4325.56,3437.26 4341.56,3421.26 v1(4385,3421.26) 4385,2795.94 3980,2390.94 3980,2295.94 3995,2280.94 4015,2280.94 4135,2400.94 v1(4190,2400.94)
SERVO_PWM: J3.3 U4.30_L | length 939.1
  Top Layer w10: J3.3 1965,1210.94 1855,1320.94 1855,1560.94 2001.52,1707.46 2191.52,1707.46 U4.30_L
SW: PS1.1 SW1.2 | length 2249.5
  Top Layer w10: v1(4410,831.26) 4655.31,831.26 5660,1835.94 5660,2095.94 5697.64,2133.59 5852.36,2133.59 5885,2100.94 SW1.2
  Bottom Layer w10: PS1.1 4404.22,834.33 4407.29,831.26 v1(4410,831.26)
TCLK: J2.9 U4.15_L | length 662.6
  Top Layer w10: J2.9 1570,2385.94 2070,2385.94 U4.15_L
TDI: J2.5 U4.27_R | length 3344.3
  Layer 1 w10: J2.5 1580,2595.94 2860,2595.94 3600,1855.94 U4.27_R
TDO: J2.13 U4.30_R | length 3274.5
  Layer 1 w10: J2.13 1582.52,2083.43 1987.52,2083.43 2065,2005.94 3355,2005.94 3560.22,1800.73 4595.22,1800.73 U4.30_R
TMS: J2.7 U4.13_L | length 662.6
  Top Layer w10: J2.7 1575,2490.94 2075,2490.94 U4.13_L
TRST: J2.3 U4.4_R | length 3303.5
  Layer 1 w10: J2.3 1575,2690.94 2045,2690.94 2065,2710.94 2285,2710.94 2305,2690.94 4160,2690.94 4475,3005.94 4590,3005.94 U4.4_R
VBAT: BT1.P1 BT2.P1 C1.2 C2.2 PS1.6 R13.1 | length 4425.8
  Top Layer w20: v1(5750,1705.94) R13.1
  Bottom Layer w10: PS1.6 PS1.6@4258.78,824.61
  Bottom Layer w20: v1(5750,1705.94) 5896.18,1559.76 BT2.P1
  Bottom Layer w35: C1.2@4181.14,824.49 PS1.6
  Bottom Layer w40: C1.2 C1.2@4181.14,824.49
  Bottom Layer w50: BT1.P1 3638.07,700.94 3905,700.94 3992.5,613.44 4657.5,613.44 5055,1010.94 5325,1010.94 5590.04,745.91 BT2.P1 ; BT1.P1@3658.98,825.63 C2.2 C1.2
pads on no net: BT1. BT2. F1.1 F2.1 F3.1 F4.1 J2.11 J2.17 J2.19 PS1.5 S1.2 S1.4 SW1.4 SW1.5 SW1.6 U2.3 U2.4 U2.18 U3.1 U4.1_L U4.1_R U4.2_L U4.2_R U4.3_L U4.3_R U4.4_L U4.5_R U4.6_L U4.6_R U4.7_L U4.8_R U4.9_L U4.10_L U4.10_R U4.11_L U4.12_L U4.12_R U4.14_R U4.16_R U4.17_L U4.18_L U4.18_R U4.19_R U4.21_L U4.21_R U4.22_L U4.22_R U4.23_L U4.23_R U4.24_L U4.24_R U4.25_L U4.25_R U4.26_L U4.26_R U4.27_L U4.28_L U4.28_R U4.29_L U4.29_R U4.31_L U4.31_R U4.33_R U4.34_R U4.35_L U4.36_L U4.36_R U4.37_L U4.38_R U5.3 U5.6 U5.7 U5.8 U5.12 U5.14 U5.15

## Polygon pours and split planes (outlines as drawn)
GND on Top Layer "GND_L01_P016" (solid, remove dead copper, pour order 16): 1060,1200.94 1175,1200.94 cw(c1175,605.94) 1770,605.94 1770,418.31 ccw(c1789.69,418.31) 1789.69,398.62 6655.31,398.62 ccw(c6655.31,418.31) 6675,418.31 6675,4183.07 ccw(c6655.32,4183.07) 6655.32,4202.76 1789.68,4202.76 ccw(c1789.68,4183.07) 1770,4183.07 1770,3965.94 cw(c1170,3965.94) 1170,3365.94 1060,3365.94 ccw(c1060,3325.94) 1020,3325.94 1020,1240.94 ccw(c1060,1240.94)
NetJ1_1 on Top Layer "NETJ1_1_L01_P006" (solid, pour order 6): 4404.9,3574 4439.31,3574 4449.49,3584.18 4483.7,3584.18 4485.53,3586.01 4468.02,3603.53 4468.02,3619.61 4451.12,3619.61 4438.9,3607.4 4404.28,3607.4
NetJ1_2 on Top Layer "NETJ1_2_L01_P013" (solid, pour order 13): 4230,3572.83 4306.19,3572.83 4307.79,3574.44 4307.79,3608.09 4271.3,3608.09 4267.98,3611.4 4229.36,3611.4
5V on Top Layer "5V_L01_P015" (solid, pour order 15): 4405,3553.15 4475,3543.31 4490,3543.31 4495,3548.31 4495,3577.76 4450,3577.76 4440.16,3567.91 4405,3567.91
5V on Top Layer "5V_L01_P014" (solid, pour order 14): 4305,3568.62 4275,3568.62 4230,3558.07 4230,3523.62 4260,3523.62 4269.84,3533.46 4305,3533.46
GND on Layer 1 "GND_L02_P007" (solid, remove dead copper, pour order 7): 1060,1200.94 1175,1200.94 cw(c1175,605.94) 1770,605.94 1770,418.31 ccw(c1789.69,418.31) 1789.69,398.62 6655.31,398.62 ccw(c6655.31,418.31) 6675,418.31 6675,4183.07 ccw(c6655.32,4183.07) 6655.32,4202.76 1789.68,4202.76 ccw(c1789.68,4183.07) 1770,4183.07 1770,3965.94 cw(c1170,3965.94) 1170,3365.94 1060,3365.94 ccw(c1060,3325.94) 1020,3325.94 1020,1240.94 ccw(c1060,1240.94)
GND on Layer 2 "GND_L03_P008" (solid, remove dead copper, pour order 8): 1060,1200.94 1175,1200.94 cw(c1175,605.94) 1770,605.94 1770,418.31 ccw(c1789.69,418.31) 1789.69,398.62 6655.31,398.62 ccw(c6655.31,418.31) 6675,418.31 6675,4183.07 ccw(c6655.32,4183.07) 6655.32,4202.76 1789.68,4202.76 ccw(c1789.68,4183.07) 1770,4183.07 1770,3965.94 cw(c1170,3965.94) 1170,3365.94 1060,3365.94 ccw(c1060,3325.94) 1020,3325.94 1020,1240.94 ccw(c1060,1240.94)
GND on Bottom Layer "GND_L04_P009" (solid, remove dead copper, pour order 9): 1060,1200.94 1175,1200.94 cw(c1175,605.94) 1770,605.94 1770,418.31 ccw(c1789.69,418.31) 1789.69,398.62 6655.31,398.62 ccw(c6655.31,418.31) 6675,418.31 6675,4183.07 ccw(c6655.32,4183.07) 6655.32,4202.76 1789.68,4202.76 ccw(c1789.68,4183.07) 1770,4183.07 1770,3965.94 cw(c1170,3965.94) 1170,3365.94 1060,3365.94 ccw(c1060,3325.94) 1020,3325.94 1020,1240.94 ccw(c1060,1240.94)

## Other copper
Multi-Layer:
  pour cut-out: 1770,4202.76 1770,4005.91 6675,4005.91 6675,4202.76
  pour cut-out: 1770,398.62 1770,595.47 6675,595.47 6675,398.62

## Silkscreen, mask and mechanical layers (free items; w line width, h text height)
Top Overlay:
  drawing of 9 lines, arcs and shapes, not listed
  text "+" at 4185,3812.61 h50
  text "-" at 4495,3810.95 h50
  text "Motor" at 4650,3715.94 h60 r90
  text "MARIO" at 2616,3671.94 h80
  text "KAR" at 2616,3536.94 h80
  text "PWM" at 2336.3,3457.8 h31.5 r270
  text "+" at 2263.7,3453.04 h31.5 r180
  text "-" at 2135.56,3447.8 h31.5 r270
  text "Team A6" at 2605,3430.94 h50
  text "18-500" at 2610,3335.94 h50
  text "OFF" at 6260,2335.94 h50 r90
  text "ON" at 6265,1780.94 h50 r90
  text "RESET" at 1125,1575.94 h50
  text "-" at 2234.44,1237.24 h31.5 r90
  text "+" at 2106.3,1232 h31.5
  text "PWM" at 2033.7,1227.24 h31.5 r90
  text "Servo" at 2375,760.94 h60 r90
Mechanical 1:
  lines w10: 1770,605.32 1770,418.31 ccw(c1789.69,418.31) 1789.69,398.62 6655.31,398.62 ccw(c6655.31,418.31) 6675,418.31 6675,605.94 6675,3965.94 6675,4005.94 ; 1770,605.94 ccw(c1175,605.94) 1175,1200.94 1060,1200.94 cw(c1060,1240.94) 1020,1240.94 1020,3325.94 cw(c1060,3325.94) 1060,3365.94 1170,3365.94 ccw(c1170,3965.94) 1770,3965.94 1770,4005.94 1770,4183.07 cw(c1789.68,4183.07) 1789.68,4202.76 6655.32,4202.76 cw(c6655.32,4183.07) 6675,4183.07 6675,4000.98

## Text inside footprints (layer, text, board x,y; h text height)
D1: Top Overlay "+" at 6056.81,2564.25 h24 r90; Mechanical 13 "+" at 6056.81,2564.25 h24 r90
U1: Mechanical 13 "*" at 4455,1400.94 h50; Bottom Overlay "*" at 4455,1400.94 h50
U2: Top Overlay "*" at 4400,3431.26 h50 r180; Mechanical 13 "*" at 4397.03,3505.76 h50 r180
U5: Top Overlay "*" at 1105,2340.94 h50; Mechanical 13 "*" at 1181.3,2325.31 h50